# Altium PCB PCB1.PcbDoc
Units mm, origin at the board's own origin, x right, y up, seen from the top; angles counter-clockwise.
Board outline 60.2 x 33.53 mm, 2 copper layers (Top Layer, Bottom Layer); 15 components, 12 nets, 59 pads, 0 vias.
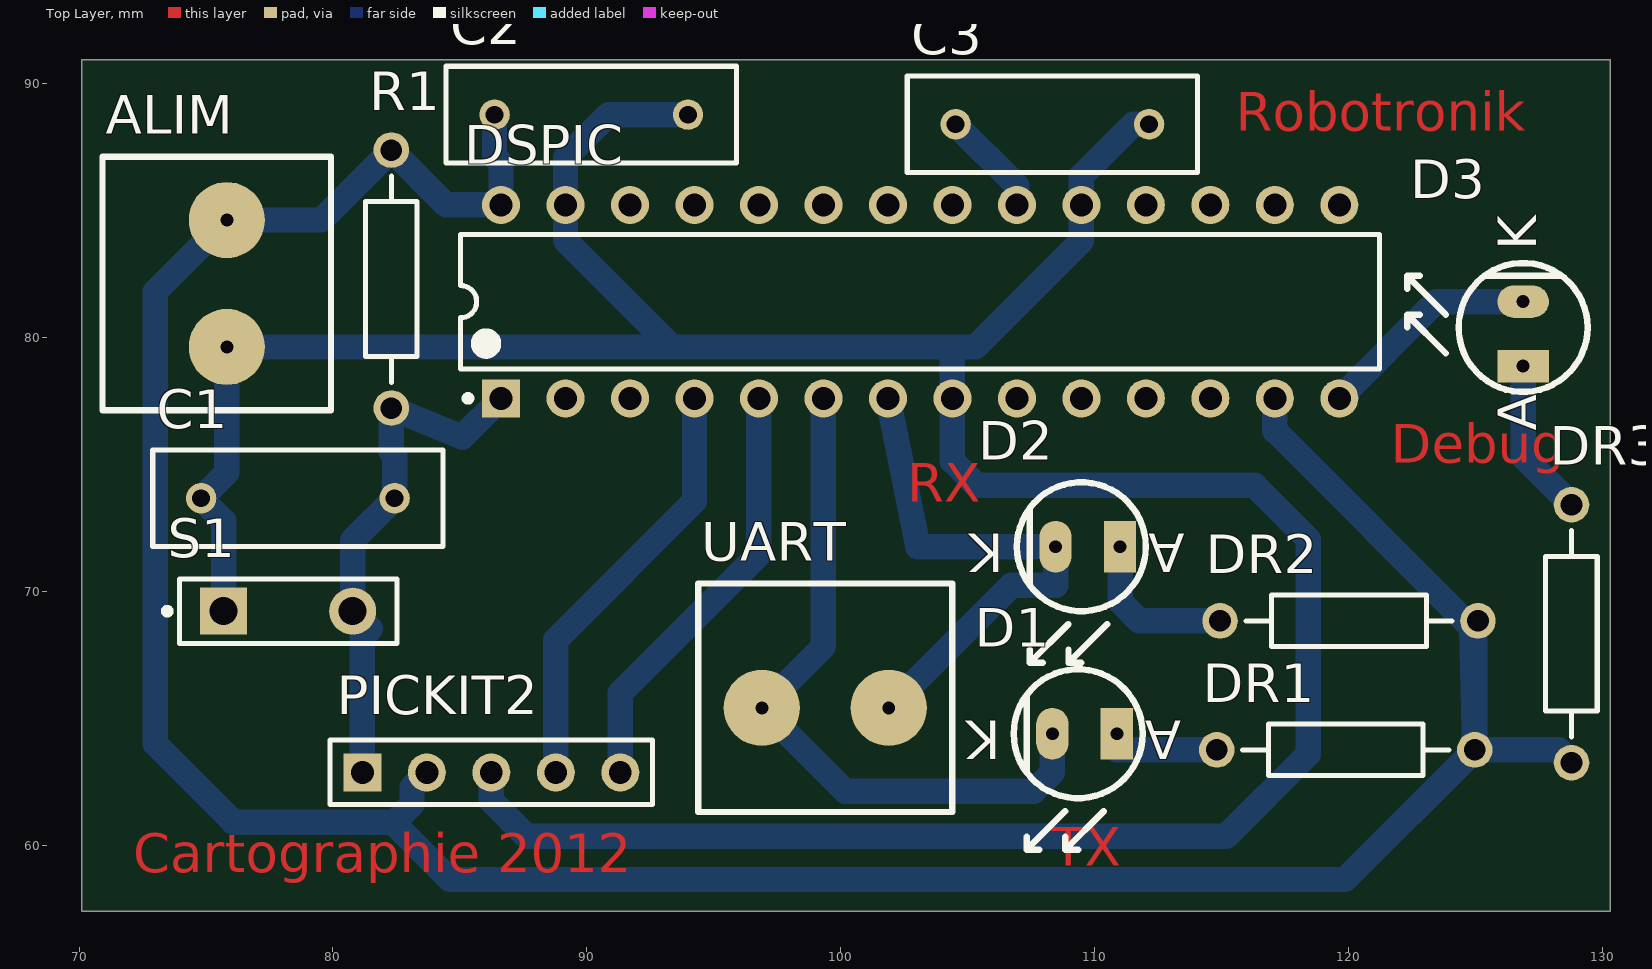
[diagram p0: Top Layer view]
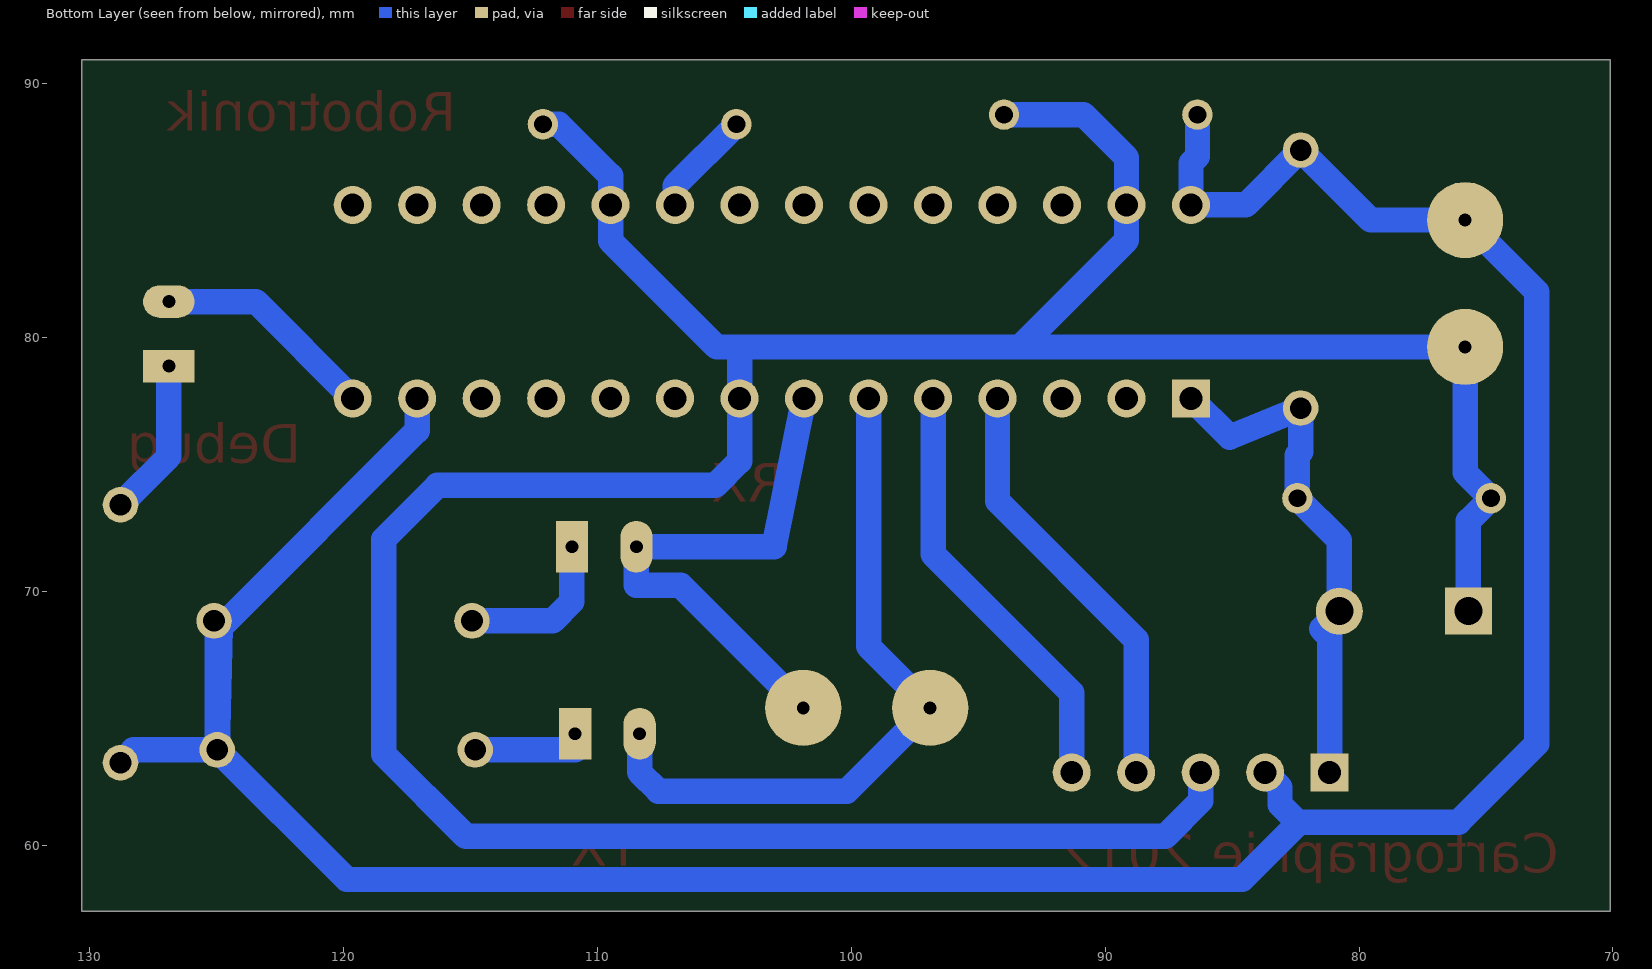
[diagram p1: Bottom Layer view, seen from below]

## Layer stack, top to bottom
Top Layer: signal copper 0.0356
Dielectric: dielectric 0.32, FR-4, Dk 4.8
Bottom Layer: signal copper 0.0356

## Board outline
70.111,90.932 70.111,57.404 130.309,57.404 130.309,90.932

## Design rules (kind name [scope] priority, off if disabled: settings)
Clearance [All] p1: gap=0.7
PolygonConnect [All] p1: connectstyle=Relief reliefconductorwidth=0.508 reliefentries=4 polygonreliefangle="90 Angle"
RoomDefinition Sheet1 [InComponentClass('Sheet1')] p1: confinementstyle=ConfineIn formatcopy=TRUE lockcomponents=FALSE outline 70.111,57.404 130.309,57.404 130.309,90.932 70.111,90.932
RoutingLayers [All] p1: top layer_v5=FALSE bottom layer_v5=TRUE
RoutingVias [All] p1: holewidth=0.508 width=1.524 viastyle="Through Hole" minholewidth=0.508 minwidth=1.524 maxholewidth=0.508 maxwidth=1.524
SilkscreenOverComponentPads [All] p1: minsilkscreentomaskgap=0.254
SolderMaskExpansion [All] p1: expansion=0.102
Width [All] p1: maxlimit=1 minlimit=0.508 preferedwidth=1
26 further rules are at their usual default settings.

## Components (designator, comment, footprint, x,y, rotation, side; value= is the part's Value field where it differs from the comment)
ALIM "Bornier_2" Bornier_2 75.826,87.122 r270 top
C1 "Cap" RAD-0.3 78.62,73.66 r0 top
C2 "Cap" RAD-0.3 90.177,88.773 r180 top
C3 "Cap" RAD-0.3 108.338,88.392 r180 top
D1 "Led Verte" LED 110.878,64.389 r180 top
D2 "Led Orange" LED 111.005,71.755 r180 top
D3 "Led Rouge" LED 126.88,78.867 r90 top
DR1 "Res2" AXIAL-0.4 119.895,63.754 r0 top
DR2 "Res2" AXIAL-0.4 120.022,68.834 r0 top
DR3 "Res2" AXIAL-0.4 128.785,68.326 r270 top
DSPIC "DSPIC33FJ128MC802-I/SP" SPDIP300-SP28 103.131,81.407 r90 top
PICKIT2 "Header 5H" HDR1X5 81.16,62.865 r0 top
R1 "Res2" AXIAL-0.4 82.303,82.296 r90 top
S1 "SW-SPST" SPST-2 78.239,69.215 r0 top
UART "UART" Bornier_2 104.394,65.405 r180 top

## Footprints (in the part's own frame and the unit in brackets; to place one, negate y for a bottom-side part, rotate by r counter-clockwise, add the part's x,y. Pads: shape width x height; smd on the part's side, far side on the other; paste and mask are expansions set on the pad)
AXIAL-0.4 [mm] "Axial Device, Thru-Hole; 2 Leads; 0.4 in Pin Spacing"
  round 1.4 hole 0.85: 1(-5.08,0) 2(5.08,0)
  silkscreen extent -4.06,-1.02 4.06,1.02
Bornier_2 [mm]
  round 3 hole 0.508: 1(2.5,0) 2(7.5,0)
  silkscreen extent 0,-4.9 10,4.1
HDR1X5 [mm] "Connector; Header; 5 Position"
  rect 1.5x1.5 hole 0.9: 1(0,0)
  round 1.5 hole 0.9: 2(2.54,0) 3(5.08,0) 4(7.62,0) 5(10.16,0)
  silkscreen extent -1.27,-1.27 11.43,1.27
LED [mil]
  rect 50x80 hole 20: 1(0,0)
  oval 50x80 hole 20: 2(100,0)
  silkscreen extent -40,-100 160,180
RAD-0.3 [mm] "Radial Cap, Thru-Hole; 2 Leads; 0.3 in Pin Spacing"
  round 1.2 hole 0.7: 1(-3.81,0) 2(3.81,0)
  silkscreen extent -5.71,-1.91 5.71,1.91
SPDIP300-SP28 [mm] "DIP, 28-Leads, Row Spacing 7.62mm, Pitch 2.54mm, Body 34.9x6.8mm"
  rect 1.5x1.5 hole 0.9: 1(-3.81,16.51)
  round 1.5 hole 0.9: 2(-3.81,13.97) 3(-3.81,11.43) 4(-3.81,8.89) 5(-3.81,6.35) 6(-3.81,3.81) 7(-3.81,1.27) 8(-3.81,-1.27) 9(-3.81,-3.81) 10(-3.81,-6.35) 11(-3.81,-8.89) 12(-3.81,-11.43) 13(-3.81,-13.97) 14(-3.81,-16.51) 15(3.81,-16.51) 16(3.81,-13.97) 17(3.81,-11.43) 18(3.81,-8.89) 19(3.81,-6.35) 20(3.81,-3.81) 21(3.81,-1.27) 22(3.81,1.27) 23(3.81,3.81) 24(3.81,6.35) 25(3.81,8.89) 26(3.81,11.43) 27(3.81,13.97) 28(3.81,16.51)
  silkscreen extent -3.93,-18.1 2.65,18.1, body extent -3.55,-18.1 3.55,18.1, height 5.08
SPST-2 [mm] "Switch; 2 Leads"
  rect 1.85x1.85 hole 1.1: 1(-2.54,0)
  round 1.85 hole 1.1: 2(2.54,0)
  silkscreen extent -4.89,-1.27 4.28,1.27

## Part data
ALIM: "Header, 2-Pin"
C1 C2 C3: "Capacitor"
D1 D2 D3: library part Led, "LED"
DR1 DR2 DR3 R1: "Resistor"
DSPIC: "High-Performance 16-bit Digital Signal Controller, 128 KB Flash, 16 KB RAM, 28-Pin SPDIP, Industrial Temperature"
PICKIT2: "Header, 5-Pin, Right Angle"
S1: "Single-Pole, Single-Throw Switch"
UART: library part Bornier_2, "Header, 2-Pin"

## Nets (pads, with @x,y where several pads share a name; then routed paths per layer and width w, separated by ;. In a path a pad name is that pad's centre, name@x,y a point inside that pad or via, vN(x,y) a via of type N, cw(c..) or ccw(c..) an arc to the next point about the centre after c; other vN are vias at no path point)
DEBUG: D3.2 DSPIC.14 | length 8.8
  Bottom Layer w1: DSPIC.14 123.451,81.407 D3.2
GND: ALIM.2 C1.1 C2.1 C3.1 DSPIC.8 DSPIC.19 DSPIC.27 PICKIT2.3 S1.1 | length 130.9
  Bottom Layer w1: S1.1 75.699,72.771 C1.1 75.826,74.676 ALIM.2 93.359,79.622 ; PICKIT2.3 86.24,61.74 87.63,60.35 115.189,60.35 118.415,63.576 118.415,72.06 116.307,74.168 105.359,74.168 104.401,75.126 DSPIC.8 104.401,79.622 ; C2.1 90.856,88.773 89.161,87.078 DSPIC.27 89.161,83.82 93.359,79.622 ; C3.1 111.513,88.392 109.481,86.36 DSPIC.19 109.481,83.795 105.308,79.622 104.401,79.622 ; 93.359,79.622 104.401,79.622
NetC1_2: C1.2 DSPIC.1 PICKIT2.1 R1.1 S1.2 | length 20.7
  Bottom Layer w1: PICKIT2.1 81.16,68.199 81.478,68.516 S1.2 80.779,72.009 C1.2 82.43,75.362 82.303,75.489 R1.1 85.097,76.073 DSPIC.1
NetC3_2: C3.2 DSPIC.20 | length 4.2
  Bottom Layer w1: C3.2 106.941,85.979 DSPIC.20
NetD1_1: D1.1 DR1.1 | length 4.6
  Bottom Layer w1: D1.1 110.878,63.754 DR1.1
NetD2_1: D2.1 DR2.1 | length 6.4
  Bottom Layer w1: D2.1 111.005,69.589 111.76,68.834 DR2.1
NetD3_1: D3.1 DR3.1 | length 6.3
  Bottom Layer w1: D3.1 126.88,75.311 DR3.1
PGC: DSPIC.5 PICKIT2.5 | length 17
  Bottom Layer w1: PICKIT2.5 91.32,65.996 96.781,71.457 DSPIC.5
PGD: DSPIC.4 PICKIT2.4 | length 17
  Bottom Layer w1: PICKIT2.4 88.78,68.091 94.241,73.552 DSPIC.4
UART_RX: D2.2 DSPIC.7 UART.1 | length 21.5
  Bottom Layer w1: DSPIC.7 103.044,71.755 D2.2 108.465,70.231 106.72,70.231 UART.1
UART_TX: D1.2 DSPIC.6 UART.2 | length 27.8
  Bottom Layer w1: DSPIC.6 99.321,67.832 UART.2 100.171,62.128 107.601,62.128 108.338,62.865 D1.2
VDD: ALIM.1 C2.2 DR1.2 DR2.2 DR3.2 DSPIC.13 DSPIC.28 PICKIT2.2 R1.2 | length 123.4
  Bottom Layer w1: 82.423,60.833 84.607,58.649 119.87,58.649 DR1.2 ; PICKIT2.2 83.116,62.281 83.116,61.595 82.43,60.909 76.08,60.909 73.007,63.983 73.007,81.803 ALIM.1 79.549,84.622 R1.2 84.462,85.217 DSPIC.28 86.621,86.868 86.367,87.122 C2.2 ; DSPIC.13 117.101,76.327 DR2.2@124.848,68.58 ; DR2.2 DR2.2@124.848,68.58 ; DR3.2 128.277,63.754 DR1.2 ; DR2.2@124.848,68.58 DR1.2 ; DR2.2@124.848,68.58 124.975,68.453 DR1.2
pads on no net: DSPIC.2 DSPIC.3 DSPIC.9 DSPIC.10 DSPIC.11 DSPIC.12 DSPIC.15 DSPIC.16 DSPIC.17 DSPIC.18 DSPIC.21 DSPIC.22 DSPIC.23 DSPIC.24 DSPIC.25 DSPIC.26

## Other copper
Top Layer:
  text "Robotronik" at 115.57,88.138 h1.52
  text "Debug" at 121.666,75.057 h1.52
  text "RX" at 102.616,73.533 h1.52
  text "TX" at 108.331,59.182 h1.52
  text "Cartographie 2012" at 72.136,58.928 h1.52

## Text inside footprints (layer, text, board x,y; h text height)
D1: Top Overlay "A" at 113.418,64.897 h1.52 r180; Top Overlay "K" at 106.306,64.897 h1.52 r180
D2: Top Overlay "A" at 113.545,72.263 h1.52 r180; Top Overlay "K" at 106.433,72.263 h1.52 r180
D3: Top Overlay "A" at 127.388,76.327 h1.52 r90; Top Overlay "K" at 127.388,83.439 h1.52 r90